# EAGLE board Schematic_pcb_OpenBook (EAGLE 9.7.0)
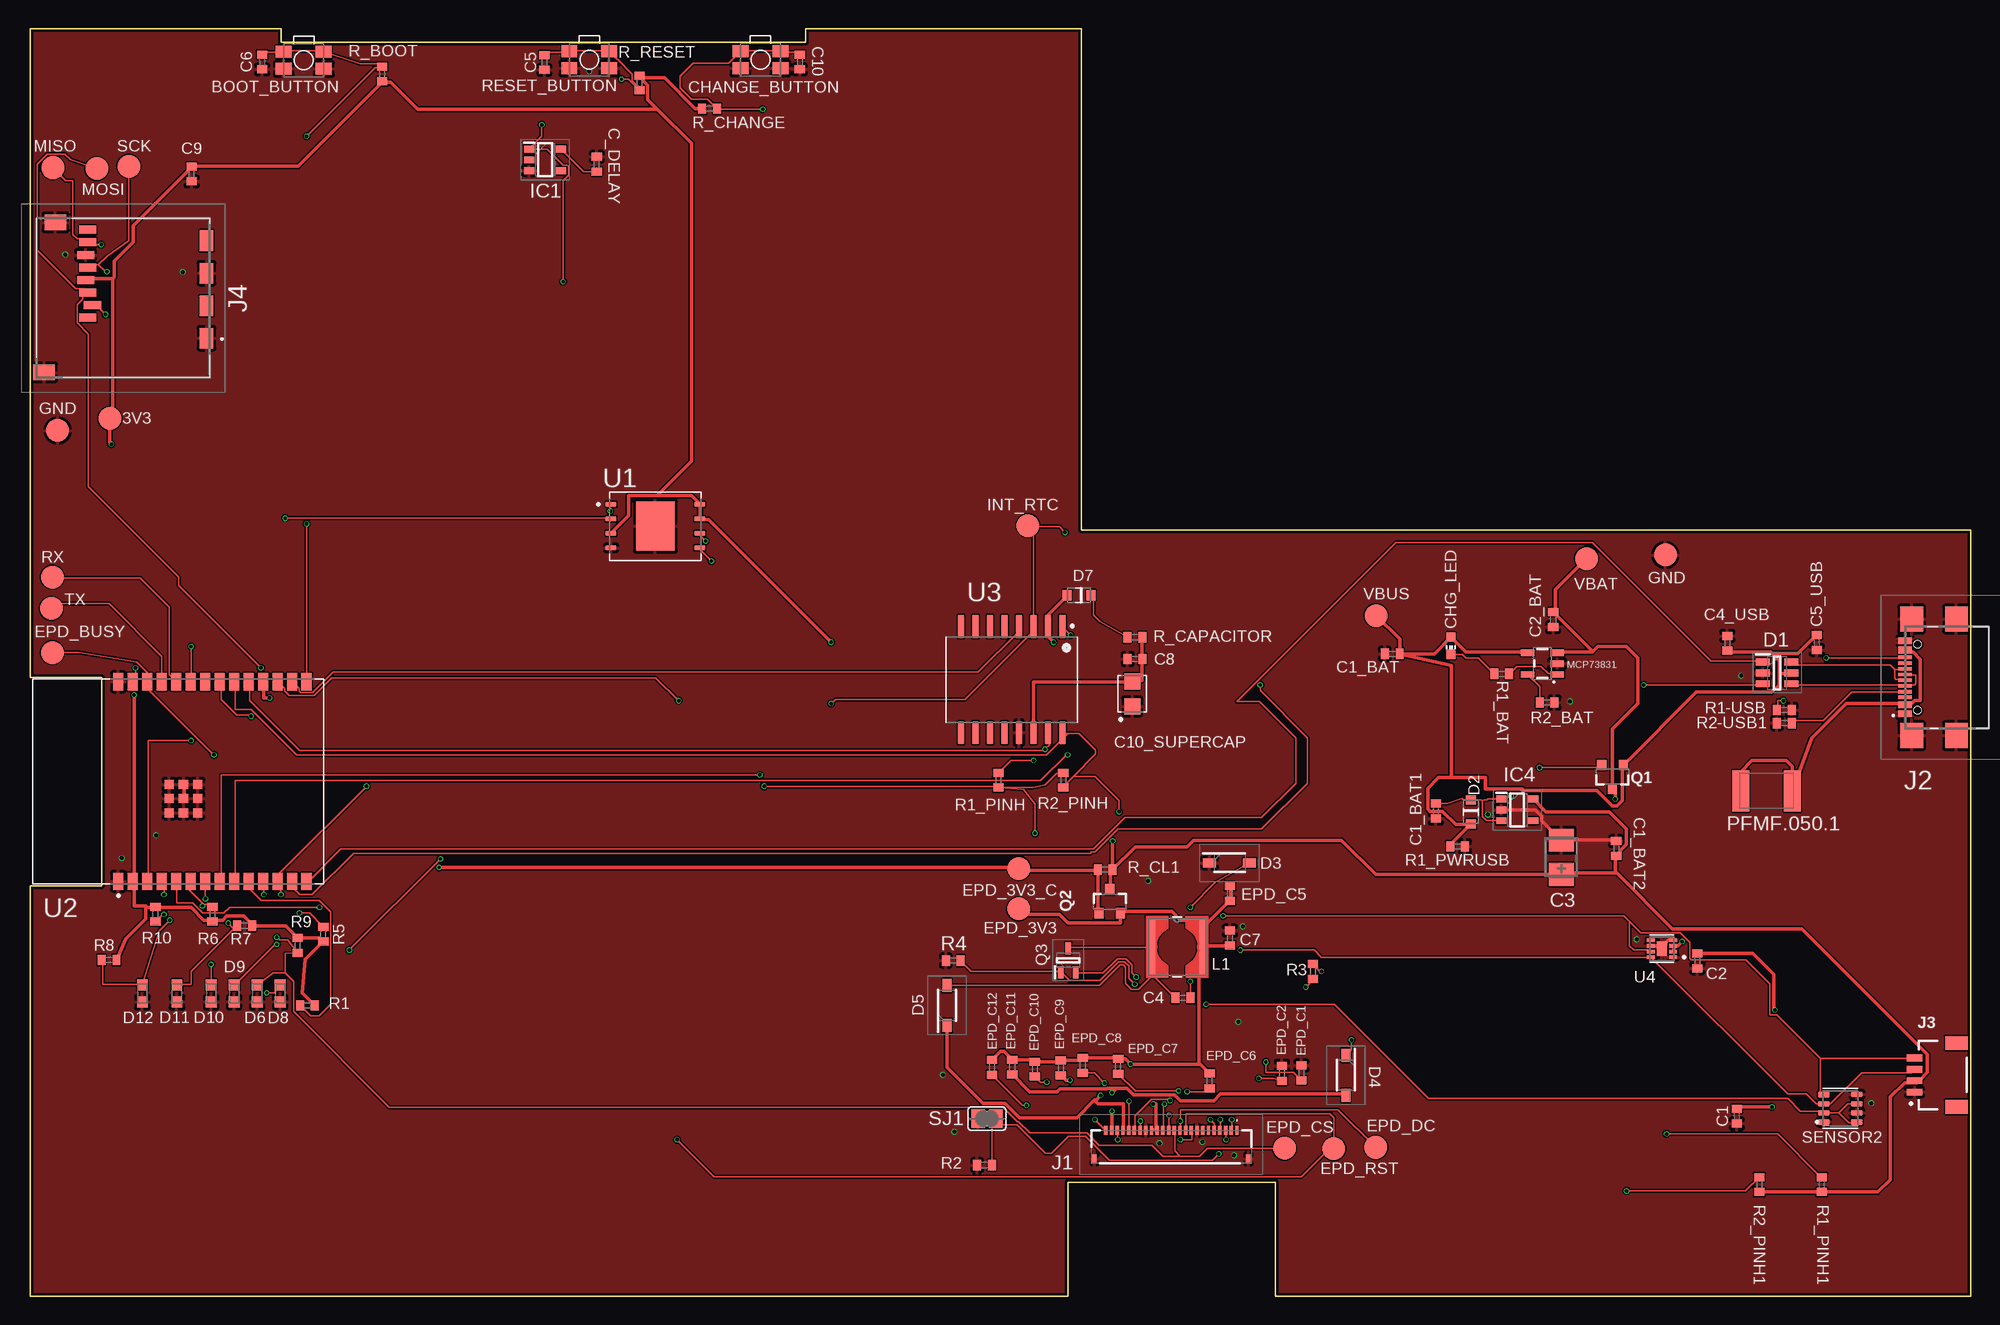
[diagram p0: board, top side]
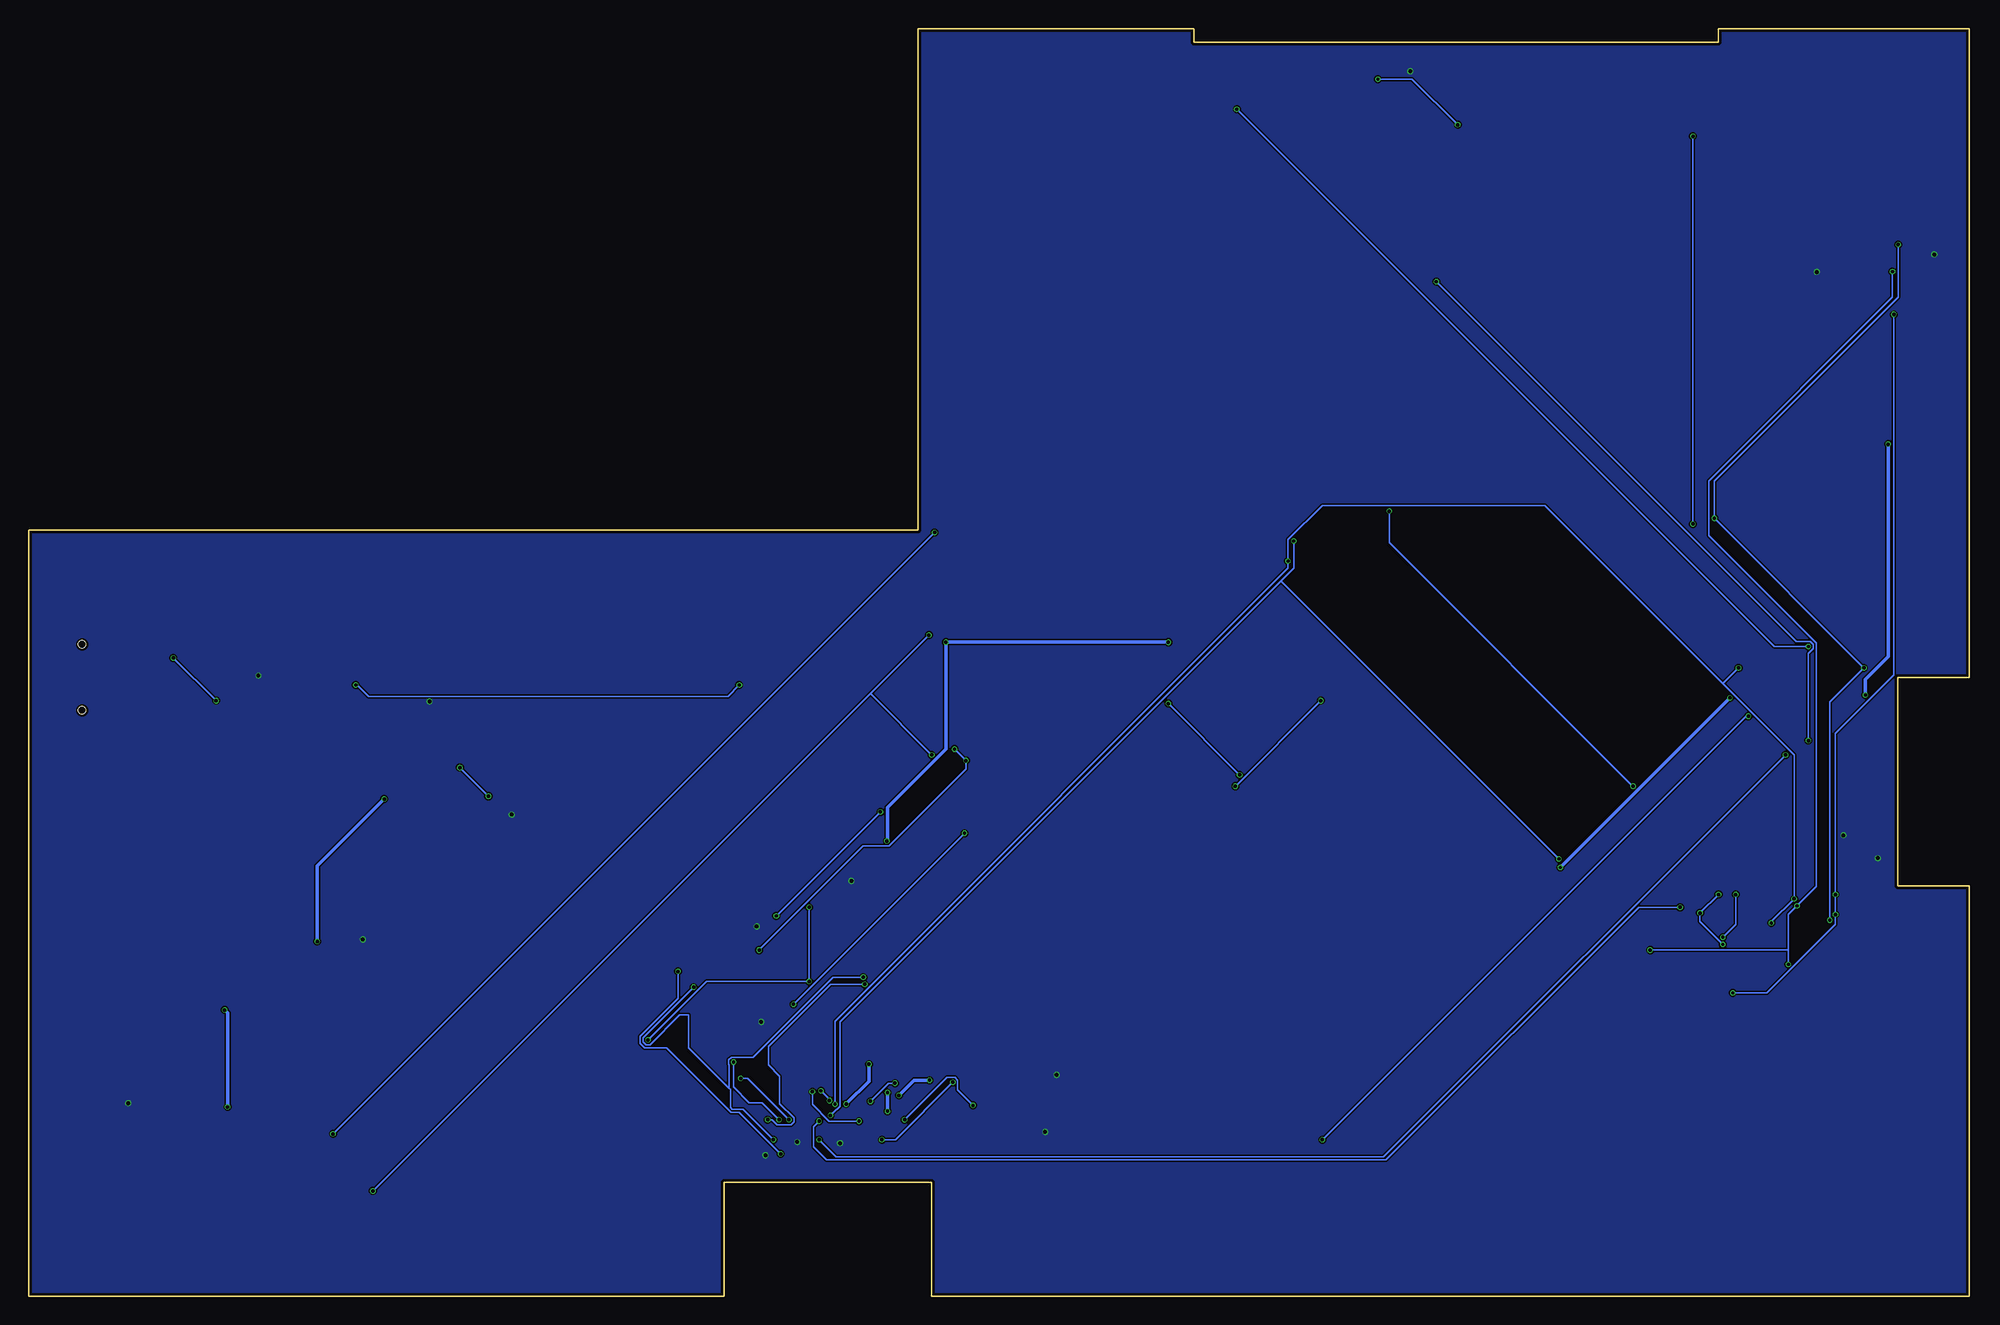
[diagram p1: board, bottom side, seen from below]

Size 170.2 x 111.2 mm. Coordinates in mm from the lower left corner, seen from the top.
Outline: 0,36 0,0 91,0 91,10 109.2,10 109.2,0 170.2,0 170.2,67.2 92.2,67.2 92.2,111.2 68,111.2 68,110 22.04,110 22.04,111.2 0,111.2 0,54.29 6.28,54.29 6.28,36 0,36
Copper layers (1*16): Top 0.035mm / dielectric 1.6mm / Bottom 0.035mm
Design rules "jlcpcb-2layers": minimum track width 0.15mm, minimum drill 0.3mm, track to track 5mil, track to pad 5mil, pad to pad 5mil, via to via 5mil, smd to smd 5mil, copper to edge 0.2mm, drill to drill 6mil, minimum pad ring 10mil, minimum via ring 3mil, stop-mask expansion 4mil, vias tented up to drill 0mil, thermal gap 10mil
Net classes: 1 PWR: width 0.3 mm

## Footprints (pad centres in the part's own frame; a part is rotated, then mirrored left to right if it is on the bottom)
MYBUTTON = smd 1.4 x 1.05: 1 1.75,0.75; 2 -1.75,0.75; 3 -1.75,-0.75; 4 1.75,-0.75
EAGLE-LTSPICE_C0402 = smd 0.7 x 0.9: 1 -0.65,0; 2 0.65,0
RCL_CT3528 = smd 2 x 2.2: + -1.5,0; - 1.5,0
CAPCP3225X100N = smd 1.4 x 1.4: 1 -1.1,0; 2 1.1,0
ADAFRUIT_CHIP-LED0603 = smd 0.8 x 0.8: A 0,-0.75; C 0,0.75
SOT95P280X145-6N = smd 1.2 x 0.6: 1 -1.25,0.95; 2 -1.25,0; 3 -1.25,-0.95; 4 1.25,-0.95; 5 1.25,0; 6 1.25,0.95
ESP32_WROVER_AVX---SD0805S020S1R0_AVX_SD0805S020S1R0_0 = smd 0.8 x 0.9: 1 -1.05,0; 2 1.05,0
SOD3716X135N = smd 1.15 x 0.8: 1 -1.75,0; 2 1.75,0
DIOC1608X36N = smd 0.97 x 0.94: 1 -0.75,0; 2 0.75,0
SOT95P280X125-5N = smd 0.9 x 0.6: 1 -1.4,0.95; 2 -1.4,0; 3 -1.4,-0.95; 4 1.4,-0.95; 5 1.4,0.95
SOT95P280X120-5N = smd 0.9 x 0.6: 1 -1.4,0.95; 2 -1.4,0; 3 -1.4,-0.95; 4 1.4,-0.95; 5 1.4,0.95
FH34SRJ24S05SH99 = smd 0.3 x 0.8: 1 5.75,1.45; 2 5.25,1.45; 3 4.75,1.45; 4 4.25,1.45; 5 3.75,1.45; 6 3.25,1.45; 7 2.75,1.45; 8 2.25,1.45; 9 1.75,1.45; 10 1.25,1.45; 11 0.75,1.45; 12 0.25,1.45; 13 -0.25,1.45; 14 -0.75,1.45; 15 -1.25,1.45; 16 -1.75,1.45; 17 -2.25,1.45; 18 -2.75,1.45; 19 -3.25,1.45; 20 -3.75,1.45; 21 -4.25,1.45; 22 -4.75,1.45; 23 -5.25,1.45; 24 -5.75,1.45 | smd 0.4 x 0.8: MP1 6.75,-1.05; MP2 -6.75,-1.05
SAMACSYS_PARTS_USB4110GFA = smd 0.3 x 1.15: A1 -3.35,3.678; A4 -2.55,3.678; A5 -1.25,3.678; A6 -0.25,3.678; A7 0.25,3.678; A8 1.25,3.678; A9 2.55,3.678; A12 3.35,3.678; B1 3.05,3.678; B4 2.25,3.678; B5 1.75,3.678; B6 0.75,3.678; B7 -0.75,3.678; B8 -1.75,3.678; B9 -2.25,3.678; B12 -3.05,3.678 | smd 2.18 x 2: MP1 -5.11,-0.827; MP2 5.11,-0.827; MP3 -5.11,3.103; MP4 5.11,3.103 | hole 0.65: -2.89,2.603; 2.89,2.603
JST04_1MM_RA = smd 0.6 x 1.35: 1 -1.5,0; 2 -0.5,0; 3 0.5,0; 4 1.5,0 | smd 1.2 x 2: NC1 2.8,-3.675; NC2 -2.8,-3.675
112ATAARR03ATTEND = smd 1.8 x 1.2: G1 10.6,10.4; G2 4.9,10.4; S1 7.75,10.4; S2 2.05,10.4 | smd 1.4 x 1.9: G3 13.6,-3.85; G4 0.45,-2.85 | smd 0.7 x 1.5: P1 8.8,0; P2 7.7,0.4; P3 6.6,0; P4 5.5,-0.2; P5 4.4,0; P6 3.3,-0.2; P7 2.2,0; P8 1.1,0
IND_4828-WE-TPC_WRE = smd 0.635 x 4.826: 1 -2.286,0; 2 2.286,0
ESP32_WROVER_SPARKFUN-IC-POWER_SOT23-5 = smd 0.55 x 1.2: 1 -0.95,-1.3; 2 0,-1.3; 3 0.95,-1.3; 4 0.95,1.3; 5 -0.95,1.3
ESP32C6_VARISTOR_CT/CN1812 = smd 1.5 x 3.6: 1 -2.25,0; 2 2.25,0
ESP32_WROVER_SPARKFUN-DISCRETESEMI_SOT23-3 = smd 0.8 x 0.9: 1 -0.95,-1; 2 0.95,-1; 3 0,1.1
SOT65P210X110-3N = smd 1.05 x 0.5: 1 -1.05,0.65; 2 -1.05,-0.65; 3 1.05,0
ESP32_WROVER_EAGLE-LTSPICE_R0402 = smd 0.7 x 0.9: 1 -0.65,0; 2 0.65,0
ESP32_WROVER_BME680_PSON80P300X300X100-8N = smd 1.016 x 0.5: 1 1.458,1.2; 2 1.458,0.4; 3 1.458,-0.4; 4 1.458,-1.2; 5 -1.458,-1.22; 6 -1.458,-0.4; 7 -1.458,0.4; 8 -1.458,1.2
SJ = smd 1.168 x 1.6: 1 -0.762,0; 2 0.762,0
TP20R = smd 2 x 2: TP 0,0
SON127P600X800X80-9N = smd 0.94 x 0.44: 1 -3.895,1.905; 2 -3.895,0.635; 3 -3.895,-0.635; 4 -3.895,-1.905; 5 3.895,-1.905; 6 3.895,-0.635; 7 3.895,0.635; 8 3.895,1.905 | smd 3.4 x 4.3: 9 0,0
XCVR_ESP32-C6-WROOM-1-N8 = smd 1.5 x 0.9: 1 -8.75,5.26; 2 -8.75,3.99; 3 -8.75,2.72; 4 -8.75,1.45; 5 -8.75,0.18; 6 -8.75,-1.09; 7 -8.75,-2.36; 8 -8.75,-3.63; 9 -8.75,-4.9; 10 -8.75,-6.17; 11 -8.75,-7.44; 12 -8.75,-8.71; 13 -8.75,-9.98; 14 -8.75,-11.25; 15 8.75,-11.25; 16 8.75,-9.98; 17 8.75,-8.71; 18 8.75,-7.44; 19 8.75,-6.17; 20 8.75,-4.9; 21 8.75,-3.63; 22 8.75,-2.36; 23 8.75,-1.09; 24 8.75,0.18; 25 8.75,1.45; 26 8.75,2.72; 27 8.75,3.99; 28 8.75,5.26 | smd 0.8 x 0.8: 29_1 -2.755,0.79; 29_2 -1.505,0.79; 29_3 -0.255,0.79; 29_4 -2.755,-0.46; 29_5 -1.505,-0.46; 29_6 -0.255,-0.46; 29_7 -2.755,-1.71; 29_8 -1.505,-1.71; 29_9 -0.255,-1.71
SOIC127P1032X265-16N = smd 2.05 x 0.59: 1 -4.655,4.445; 2 -4.655,3.175; 3 -4.655,1.905; 4 -4.655,0.635; 5 -4.655,-0.635; 6 -4.655,-1.905; 7 -4.655,-3.175; 8 -4.655,-4.445; 9 4.655,-4.445; 10 4.655,-3.175; 11 4.655,-1.905; 12 4.655,-0.635; 13 4.655,0.635; 14 4.655,1.905; 15 4.655,3.175; 16 4.655,4.445
SON50P200X200X80-9N = smd 0.76 x 0.31: 1 -0.985,0.75; 2 -0.985,0.25; 3 -0.985,-0.25; 4 -0.985,-0.75; 8 0.985,0.75 | smd 0.762 x 0.31: 5 0.985,-0.75; 6 0.985,-0.25; 7 0.985,0.25 | smd 0.9 x 1.3: 9 0,0

## Placement (x,y rotation side)
BOOT_BUTTON  BUTTON_CUSYOMV1  [MYBUTTON]  24,108.41 180 top
C1  100nF  [EAGLE-LTSPICE_C0402]  149.66,15.82 270 top
C1_BAT  4.7uF  [EAGLE-LTSPICE_C0402]  119.45,56.36 180 top
C1_BAT1  4.7uF  [EAGLE-LTSPICE_C0402]  123.28,42.57 270 top
C1_BAT2  4.7uF  [EAGLE-LTSPICE_C0402]  139.09,39.28 90 top
C2  100nF  [EAGLE-LTSPICE_C0402]  146.2,29.43 270 top
C2_BAT  4.7uF  [EAGLE-LTSPICE_C0402]  133.56,59.36 270 top
C3  100uF  [RCL_CT3528]  134.26,38.52 90 top
C4  4.7uF/25V  [EAGLE-LTSPICE_C0402]  101.09,26.2 180 top
C4_USB  100nF  [EAGLE-LTSPICE_C0402]  148.83,57.28 90 top
C5  1uF  [EAGLE-LTSPICE_C0402]  45.11,108.22 270 top
C5_USB  4.7uF  [EAGLE-LTSPICE_C0402]  156.68,57.36 270 top
C6  100nF  [EAGLE-LTSPICE_C0402]  20.36,108.26 270 top
C7  10uF  [EAGLE-LTSPICE_C0402]  105.21,31.44 90 top
C8  100nF  [EAGLE-LTSPICE_C0402]  96.88,55.9 0 top
C9  100nF  [EAGLE-LTSPICE_C0402]  14.18,98.44 270 top
C10  100nF  [EAGLE-LTSPICE_C0402]  67.5,108.26 270 top
C10_SUPERCAP  CPH3225A  [CAPCP3225X100N]  96.66,52.85 90 top
C_DELAY  100nF  [EAGLE-LTSPICE_C0402]  49.7,99.31 90 top
CHANGE_BUTTON  BUTTON_CUSYOMV1  [MYBUTTON]  64.05,108.45 180 top
CHG_LED  [ADAFRUIT_CHIP-LED0603]  124.6,57.07 180 top
D1  USBLC6-2SC6Y  [SOT95P280X145-6N]  153.2,54.68 0 top
D2  ESP32_WROVER_AVX---SD0805S020S1R0_AVX_SD0805S020S1R0_0_0AVX_SD0805S020S1R0_0_0  [ESP32_WROVER_AVX---SD0805S020S1R0_AVX_SD0805S020S1R0_0]  126.34,42.49 270 top
D3  MBR0530  [SOD3716X135N]  105.18,38.03 0 top
D4  MBR0530  [SOD3716X135N]  115.39,19.4 270 top
D5  MBR0530  [SOD3716X135N]  80.41,25.52 90 top
D6  PGB1010603MR  [DIOC1608X36N]  19.93,26.57 90 top
D7  ESP32_WROVER_AVX---SD0805S020S1R0_AVX_SD0805S020S1R0_0_0AVX_SD0805S020S1R0_0_0  [ESP32_WROVER_AVX---SD0805S020S1R0_AVX_SD0805S020S1R0_0]  91.99,61.49 180 top
D8  PGB1010603MR  [DIOC1608X36N]  21.94,26.57 90 top
D9  PGB1010603MR  [DIOC1608X36N]  17.91,26.57 90 top
D10  PGB1010603MR  [DIOC1608X36N]  15.89,26.57 90 top
D11  PGB1010603MR  [DIOC1608X36N]  12.88,26.57 90 top
D12  PGB1010603MR  [DIOC1608X36N]  9.86,26.57 90 top
EPD_C1  1uF/50V  [EAGLE-LTSPICE_C0402]  111.48,19.61 270 top
EPD_C2  1uF/50V  [EAGLE-LTSPICE_C0402]  109.77,19.58 270 top
EPD_C5  0.1uF/50V  [EAGLE-LTSPICE_C0402]  105.21,35.34 270 top
EPD_C6  1uF/50V  [EAGLE-LTSPICE_C0402]  103.44,18.91 270 top
EPD_C7  1uF/50V  [EAGLE-LTSPICE_C0402]  95.42,20.18 270 top
EPD_C8  1uF/50V  [EAGLE-LTSPICE_C0402]  92.31,20.26 270 top
EPD_C9  1uF/50V  [EAGLE-LTSPICE_C0402]  90.39,20.05 90 top
EPD_C10  1uF/50V  [EAGLE-LTSPICE_C0402]  88.11,19.95 270 top
EPD_C11  1uF/50V  [EAGLE-LTSPICE_C0402]  86.13,20.12 270 top
EPD_C12  1uF/50V  [EAGLE-LTSPICE_C0402]  84.35,20.1 270 top
IC1  BD5229G-TR  [SOT95P280X125-5N]  45.17,99.68 0 top
IC4  XC6220A331MR-G  [SOT95P280X120-5N]  130.41,42.68 0 top
J1  FH34SRJ-24S-0.5SH_99_  [FH34SRJ24S05SH99]  100.08,13.11 0 top
J2  SAMACSYS_PARTS_USB4110-GF-A  [SAMACSYS_PARTS_USB4110GFA]  168.1,54.3 90 top
J3  QWIIC_RIGHT_ANGLE  [JST04_1MM_RA]  165.25,19.43 90 top
J4  112A-TAAR-R03_ATTEND  [112ATAARR03ATTEND]  5.08,94.64 270 top
L1  744043680IND_4828-WE-TPC_WRE  [IND_4828-WE-TPC_WRE]  100.59,30.66 0 top
MCP73831  ESP32_WROVER_SPARKFUN-IC-POWER_MCP73831  [ESP32_WROVER_SPARKFUN-IC-POWER_SOT23-5]  132.61,55.5 90 top
PFMF.050.1  ESP32C6_VARISTORCN1812  [ESP32C6_VARISTOR_CT/CN1812]  152.28,44.34 0 top
Q1  20V/4.2A/52mΩ/1.4W  [ESP32_WROVER_SPARKFUN-DISCRETESEMI_SOT23-3]  138.76,45.61 180 top
Q2  20V/4.2A/52mΩ/1.4W  [ESP32_WROVER_SPARKFUN-DISCRETESEMI_SOT23-3]  94.68,34.61 0 top
Q3  SI1308EDL-T1-GE3  [SOT65P210X110-3N]  91.04,29.49 90 top
R1  10K  [ESP32_WROVER_EAGLE-LTSPICE_R0402]  24.33,25.52 0 top
R1-USB  5k1  [ESP32_WROVER_EAGLE-LTSPICE_R0402]  153.84,51.44 0 top
R1_BAT  200  [ESP32_WROVER_EAGLE-LTSPICE_R0402]  129.05,54.6 0 top
R1_PINH  10K  [ESP32_WROVER_EAGLE-LTSPICE_R0402]  84.93,45.28 90 top
R1_PINH1  10K  [ESP32_WROVER_EAGLE-LTSPICE_R0402]  157.12,9.82 90 top
R1_PWRUSB  100k  [ESP32_WROVER_EAGLE-LTSPICE_R0402]  125.18,39.47 180 top
R2  2.2  [ESP32_WROVER_EAGLE-LTSPICE_R0402]  83.69,11.52 0 top
R2-USB1  5k1  [ESP32_WROVER_EAGLE-LTSPICE_R0402]  153.84,50.28 0 top
R2_BAT  2K  [ESP32_WROVER_EAGLE-LTSPICE_R0402]  133.03,52.09 180 top
R2_PINH  10K  [ESP32_WROVER_EAGLE-LTSPICE_R0402]  90.61,45.28 270 top
R2_PINH1  10K  [ESP32_WROVER_EAGLE-LTSPICE_R0402]  151.63,9.82 90 top
R3  0.47  [ESP32_WROVER_EAGLE-LTSPICE_R0402]  112.49,28.52 270 top
R4  10K  [ESP32_WROVER_EAGLE-LTSPICE_R0402]  80.96,29.46 0 top
R5  10K  [ESP32_WROVER_EAGLE-LTSPICE_R0402]  25.72,31.78 90 top
R6  10K  [ESP32_WROVER_EAGLE-LTSPICE_R0402]  16,33.53 90 top
R7  10K  [ESP32_WROVER_EAGLE-LTSPICE_R0402]  18.83,32.52 180 top
R8  10K  [ESP32_WROVER_EAGLE-LTSPICE_R0402]  6.93,29.52 180 top
R9  10K  [ESP32_WROVER_EAGLE-LTSPICE_R0402]  23.47,30.78 270 top
R10  10K  [ESP32_WROVER_EAGLE-LTSPICE_R0402]  11,33.53 270 top
R_BOOT  10K  [ESP32_WROVER_EAGLE-LTSPICE_R0402]  30.88,107.22 90 top
R_CAPACITOR  15  [ESP32_WROVER_EAGLE-LTSPICE_R0402]  96.88,57.81 0 top
R_CHANGE  10K  [ESP32_WROVER_EAGLE-LTSPICE_R0402]  59.6,104.17 0 top
R_CL1  10K  [ESP32_WROVER_EAGLE-LTSPICE_R0402]  94.28,37.44 0 top
R_RESET  10K  [ESP32_WROVER_EAGLE-LTSPICE_R0402]  53.45,106.42 270 top
RESET_BUTTON  BUTTON_CUSYOMV1  [MYBUTTON]  49.04,108.45 180 top
SENSOR2  ESP32_WROVER_BME680_BME680  [ESP32_WROVER_BME680_PSON80P300X300X100-8N]  158.74,16.5 180 top
SJ1  [SJ]  83.91,15.6 0 top
TP1  TPTP20R  [TP20R]  1.87,60.34 0 top
TP2  TPTP20R  [TP20R]  1.96,63.08 0 top
TP3  TPTP20R  [TP20R]  136.49,64.7 0 top
TP4  TPTP20R  [TP20R]  2.41,75.95 0 top
TP5  TPTP20R  [TP20R]  143.41,65.03 0 top
TP6  TPTP20R  [TP20R]  2,98.99 0 top
TP7  TPTP20R  [TP20R]  5.86,98.93 0 top
TP8  TPTP20R  [TP20R]  8.67,99.11 0 top
TP9  TPTP20R  [TP20R]  1.96,56.47 0 top
TP10  TPTP20R  [TP20R]  110,13 0 top
TP11  TPTP20R  [TP20R]  118,13.08 0 top
TP12  TPTP20R  [TP20R]  114.32,12.95 0 top
TP13  TPTP20R  [TP20R]  86.72,37.52 0 top
TP14  TPTP20R  [TP20R]  118.04,59.7 0 top
TP15  TPTP20R  [TP20R]  87.49,67.6 0 top
TP16  TPTP20R  [TP20R]  7,77 0 top
TP17  TPTP20R  [TP20R]  86.69,34 0 top
U1  W25Q512JVEIQ  [SON127P600X800X80-9N]  54.83,67.56 0 top
U2  ESP32-C6-WROOM-1-N8  [XCVR_ESP32-C6-WROOM-1-N8]  13,45.17 90 top
U3  DS3231SN#  [SOIC127P1032X265-16N]  86.09,54.1 270 top
U4  MAX17048G+T10  [SON50P200X200X80-9N]  143.1,30.5 180 top

## Library data of the parts
BOOT_BUTTON CHANGE_BUTTON CHG_LED PFMF.050.1 RESET_BUTTON SJ1 TP1-TP17 = DeskAssistant v19 v1
C1 C1_BAT C1_BAT1 C1_BAT2 C2 C2_BAT C4 C4_USB C5 C5_USB C6-C10 C_DELAY EPD_C1 EPD_C2 EPD_C5-EPD_C12 = DeskAssistant v19 v1; SPICEMODEL: NONE; SPICEPREFIX: C
C3 = DeskAssistant v19 v1; SPICEPREFIX: C
C10_SUPERCAP = DeskAssistant v19 v1; AVAILABILITY: Not in stock; CHECK_PRICES: https://www.snapeda.com/parts/CPH3225A/Seiko+Instruments/view-part/?ref=eda; DESCRIPTION: 11 mF (EDLC) Supercapacitor 3.3 V 1210 (3225 Metric) - -; MF: Seiko Instruments; MP: CPH3225A; PACKAGE: 1210 Seiko; PRICE: None; PURCHASE-URL: https://www.snapeda.com/api/url_track_click_mouser/?unipart_id=562593&manufacturer=Seiko Instruments&part_name=CPH3225A&search_term=None; SNAPEDA_LINK: https://www.snapeda.com/parts/CPH3225A/Seiko+Instruments/view-part/?ref=snap
D1 = DeskAssistant v19 v1; AVAILABILITY: In Stock; CHECK_PRICES: https://www.snapeda.com/parts/USBLC6-2SC6Y/STMicroelectronics/view-part/?ref=eda; DESCRIPTION: 17V Clamp 5A (8/20µs) Ipp Tvs Diode Surface Mount SOT-23-6; MF: STMicroelectronics; MP: USBLC6-2SC6Y; PACKAGE: SOT-23-6 STMicroelectronics; PRICE: None; SNAPEDA_LINK: https://www.snapeda.com/parts/USBLC6-2SC6Y/STMicroelectronics/view-part/?ref=snap
D2 D7 = DeskAssistant v19 v1; CENTROID_NOT_SPECIFIED: No; DATASHEET: http://datasheets.avx.com/schottky.pdf; DIGIKEY_DESCRIPTION: DIODE SCHOTTKY 20V 1A 0805; DIGIKEY_PART_NUMBER: 478-7800-1-ND; LEAD_FREE: yes; MF: AVX; MOUSER_PART_NUMBER: 581-SD0805S020S1R0; PACKAGE: 0805 (2012 metric); PREFIX: D; ROHS: yes; TEMPERATURE_RANGE_HIGH: +125°C; TEMPERATURE_RANGE_LOW: -55°C
D3-D5 = DeskAssistant v19 v1; AVAILABILITY: In Stock; CHECK_PRICES: https://www.snapeda.com/parts/MBR0530/Onsemi/view-part/?ref=eda; DESCRIPTION: Diode Schottky 30 V 500mA Surface Mount SOD-123; MF: ON Semiconductor; MP: MBR0530; PACKAGE: SOD-123-2 ON Semiconductor; PRICE: None; PURCHASE-URL: https://www.snapeda.com/api/url_track_click_mouser/?unipart_id=179458&manufacturer=ON Semiconductor&part_name=MBR0530&search_term=None; SNAPEDA_LINK: https://www.snapeda.com/parts/MBR0530/Onsemi/view-part/?ref=snap
D6 D8-D12 = DeskAssistant v19 v1; AVAILABILITY: In Stock; CHECK_PRICES: https://www.snapeda.com/parts/PGB1010603MR/Littelfuse/view-part/?ref=eda; DESCRIPTION: 150V (Typ) Clamp - Ipp Tvs Diode Surface Mount 0603 (1608 Metric); MF: Littelfuse Inc.; MP: PGB1010603MR; PACKAGE: 0603 Littelfuse Inc.; PRICE: None; PURCHASE-URL: https://www.snapeda.com/api/url_track_click_mouser/?unipart_id=5659453&manufacturer=Littelfuse Inc.&part_name=PGB1010603MR&search_term=None; SNAPEDA_LINK: https://www.snapeda.com/parts/PGB1010603MR/Littelfuse/view-part/?ref=snap
IC1 = DeskAssistant v19 v1; DESCRIPTION: Voltage Detector with Adjustable Delay Time: CMOS processes are utilized to develop high precision, low current consumption CMOS reset ICs that allow arbitrary setting of the delay time. The extensive lineup includes both Nch Open Drain and CMOS output types in a wide range of detection voltages (from 2.3V to 6.0V, in 0.1V steps), enabling selection of the ideal solution based on customer requirements. In addition, the entire series is of course both lead-free and RoHS-compliant.; HEIGHT: 1.25mm; MANUFACTURER_NAME: ROHM Semiconductor; MANUFACTURER_PART_NUMBER: BD5229G-TR; MOUSER_PART_NUMBER: 755-BD5229G-TR; MOUSER_PRICE-STOCK: https://www.mouser.co.uk/ProductDetail/ROHM-Semiconductor/BD5229G-TR?qs=4kLU8WoGk0vvnhrrYwdszw%3D%3D
IC4 = DeskAssistant v19 v1; DESCRIPTION: LDO Voltage Regulators; HEIGHT: 1.2mm; MANUFACTURER_NAME: Torex; MANUFACTURER_PART_NUMBER: XC6220A331MR-G; MOUSER_PART_NUMBER: 865-XC6220A331MR-G; MOUSER_PRICE-STOCK: https://www.mouser.co.uk/ProductDetail/Torex-Semiconductor/XC6220A331MR-G?qs=AsjdqWjXhJ8ZSWznL1J0gg%3D%3D
J1 = DeskAssistant v19 v1; DESCRIPTION: 24 Position FFC, FPC Connector Contacts, Top and Bottom 0.020" (0.50mm) Surface Mount, Right Angle; HEIGHT: 1.1mm; MANUFACTURER_NAME: Hirose; MANUFACTURER_PART_NUMBER: FH34SRJ-24S-0.5SH(99); MOUSER_PART_NUMBER: 798-FH34SRJ24S05SH99; MOUSER_PRICE-STOCK: https://www.mouser.co.uk/ProductDetail/Hirose-Connector/FH34SRJ-24S-0.5SH99?qs=vcbW%252B4%252BSTIpKBl5ap9J8Fw%3D%3D
J2 = DeskAssistant v19 v1; DESCRIPTION: CONN USB 2.0 TYPE-C R/A SMT; HEIGHT: 3.26mm; MANUFACTURER_NAME: GCT (GLOBAL CONNECTOR TECHNOLOGY); MANUFACTURER_PART_NUMBER: USB4110-GF-A; MOUSER_PART_NUMBER: 640-USB4110-GF-A; MOUSER_PRICE-STOCK: https://www.mouser.co.uk/ProductDetail/GCT/USB4110-GF-A?qs=KUoIvG%2F9IlYiZvIXQjyJeA%3D%3D
J3 = DeskAssistant v19 v1; PROD_ID: CONN-13694
J4 = DeskAssistant v19 v1; DESCRIPTION: Micro SD Card Socket, Push-Push Type, Top Mount, SMT, H=1.83mm, 10u; HEIGHT: 1.9mm; MANUFACTURER_NAME: ATTEND; MANUFACTURER_PART_NUMBER: 112A-TAAR-R03 ATTEND
L1 = DeskAssistant v19 v1; COPYRIGHT: Copyright (C) 2024 Ultra Librarian. All rights reserved.; MANUFACTURER_PART_NUMBER: 68uH; MFR_NAME: Wurth Electronics
MCP73831 = DeskAssistant v19 v1; PROD_ID: IC-09995
Q1 = DeskAssistant v19 v1; PROD_ID: TRAN-14388
Q2 = DeskAssistant v19 v1; PRODUCT: DMG2305UX-7; PROD_ID: TRAN-14388
Q3 = DeskAssistant v19 v1; AVAILABILITY: In Stock; CHECK_PRICES: https://www.snapeda.com/parts/SI1308EDL-T1-GE3/Vishay+Siliconix/view-part/?ref=eda; DESCRIPTION: Si1308EDL-T1-GE3 N-channel MOSFET Transistor, 1.5 A, 30 V, 3-Pin SC-70 | Siliconix / Vishay SI1308EDL-T1-GE3; MF: Vishay Siliconix; MP: SI1308EDL-T1-GE3; PACKAGE: SOT-323 Vishay Semiconductor; PRICE: None; PURCHASE-URL: https://www.snapeda.com/api/url_track_click_mouser/?unipart_id=274603&manufacturer=Vishay Siliconix&part_name=SI1308EDL-T1-GE3&search_term=None; SNAPEDA_LINK: https://www.snapeda.com/parts/SI1308EDL-T1-GE3/Vishay+Siliconix/view-part/?ref=snap
R1 R1-USB R1_BAT R1_PINH R1_PINH1 R1_PWRUSB R2 R2-USB1 R2_BAT R2_PINH R2_PINH1 R3-R10 R_BOOT R_CAPACITOR R_CHANGE R_CL1 R_RESET = DeskAssistant v19 v1; SPICEMODEL: NONE; SPICEPREFIX: R
SENSOR2 = DeskAssistant v19 v1; AVAILABILITY: Unavailable; DESCRIPTION: Integrated Environmental Unit; MF: Bosch Sensortec; MP: BME680; PACKAGE: LGA-8 Bosch Tools; PRICE: None
U1 = DeskAssistant v19 v1; AVAILABILITY: In Stock; CHECK_PRICES: https://www.snapeda.com/parts/W25Q512JVEIQ/Winbond+Electronics/view-part/?ref=eda; DESCRIPTION: FLASH - NOR Memory IC 512Mb (64M x 8) SPI - Quad I/O 133 MHz 8-WSON (8x6); MF: Winbond Electronics; MP: W25Q512JVEIQ; PACKAGE: Package; PRICE: None; SNAPEDA_LINK: https://www.snapeda.com/parts/W25Q512JVEIQ/Winbond+Electronics/view-part/?ref=snap
U2 = DeskAssistant v19 v1; AVAILABILITY: In Stock; CHECK_PRICES: https://www.snapeda.com/parts/ESP32-C6-WROOM-1-N8/Espressif+Systems/view-part/?ref=eda; DESCRIPTION: Multiprotocol Modules ESP32-C6 module, Wi-Fi 6 in 2.4 GHz band, Bluetooth 5, Zigbee 3.0 and Thread. ESP34-WROOM Compatible - ENGINEERING SAMPLE; MF: Espressif Systems; MP: ESP32-C6-WROOM-1-N8; PACKAGE: None; PRICE: None; SNAPEDA_LINK: https://www.snapeda.com/parts/ESP32-C6-WROOM-1-N8/Espressif+Systems/view-part/?ref=snap
U3 = DeskAssistant v19 v1; AVAILABILITY: In Stock; CHECK_PRICES: https://www.snapeda.com/parts/DS3231SN%23/Analog+Devices/view-part/?ref=eda; DESCRIPTION: Extremely Accurate I²C-Integrated RTC/TCXO/Crystal; MF: Analog Devices; MP: DS3231SN#; PACKAGE: SOIC-16 Maxim; PRICE: None; PURCHASE-URL: https://www.snapeda.com/api/url_track_click_mouser/?unipart_id=99048&manufacturer=Analog Devices&part_name=DS3231SN#&search_term=None; SNAPEDA_LINK: https://www.snapeda.com/parts/DS3231SN%23/Analog+Devices/view-part/?ref=snap
U4 = DeskAssistant v19 v1; AVAILABILITY: In Stock; CHECK_PRICES: https://www.snapeda.com/parts/MAX17048G+T10/Analog+Devices/view-part/?ref=eda; DESCRIPTION: 3µA 1-Cell/2-Cell Fuel Gauge with ModelGauge; MF: Analog Devices; MP: MAX17048G+T10; PACKAGE: TDFN-8 Maxim; PRICE: None; PURCHASE-URL: https://www.snapeda.com/api/url_track_click_mouser/?unipart_id=329239&manufacturer=Analog Devices&part_name=MAX17048G+T10&search_term=None; SNAPEDA_LINK: https://www.snapeda.com/parts/MAX17048G+T10/Analog+Devices/view-part/?ref=snap

## Nets
3V3 [PWR]: C1_BAT2.1 C3.+ C9.1 D7.2 IC4.5 J3.2 J4.P4 Q2.3 R1.2 R1_PINH1.1 R2_PINH1.1 R5.1 R6.1 R7.1 R8.1 R9.1 R10.1 R_BOOT.1 R_CHANGE.1 R_CL1.2 R_RESET.1 TP16.TP U1.3 U1.7 U1.8 U2.2 U3.2
32KHZ [NORMAL]: R2_PINH1.2 U2.9 U3.1
DN [NORMAL]: D1.4 J2.A7 J2.B7
DP [NORMAL]: D1.6 J2.A6 J2.B6
EPD_3V3 [PWR]: C7.1 EPD_C5.1 EPD_C5.2 EPD_C6.1 EPD_C7.1 EPD_C8.1 EPD_C9.2 EPD_C10.1 EPD_C11.1 EPD_C12.1 J1.15 J1.16 L1.2 Q2.2 TP17.TP
EPD_3V3_C [PWR]: Q2.1 R_CL1.1 TP13.TP U2.18
EPD_BUSY [NORMAL]: J1.9 TP9.TP U2.26
EPD_CS [NORMAL]: D6.2 J1.12 R9.2 TP10.TP U2.11
EPD_DC [NORMAL]: J1.11 TP11.TP U2.5
EPD_RST [NORMAL]: J1.10 TP12.TP U2.21
FLASH_CS [NORMAL]: D9.2 R5.2 U1.1 U2.12
GDR [NORMAL]: J1.2 Q3.1 R4.2
GND [PWR]: BOOT_BUTTON.1 BOOT_BUTTON.2 C1.2 C1_BAT1.2 C1_BAT2.2 C1_BAT.2 C2.2 C2_BAT.2 C3.- C4_USB.2 C5.2 C5_USB.2 C6.2 C7.2 C8.1 C9.2 C10.2 C10_SUPERCAP.1 C_DELAY.2 CHANGE_BUTTON.1 CHANGE_BUTTON.2 D1.2 D3.1 D6.1 D8.1 D9.1 D10.1 D11.1 D12.1 EPD_C1.1 EPD_C2.1 IC1.3 IC4.2 J1.8 J1.17 J1.MP1 J1.MP2 J2.A1 J2.A12 J2.B1 J2.B12 J2.MP1 J2.MP2 J2.MP3 J2.MP4 J3.1 J4.G1 J4.G2 J4.G3 J4.G4 J4.P6 MCP73831.2 R1-USB.2 R1_PWRUSB.1 R2-USB1.1 R2.1 R2_BAT.1 R4.1 RESET_BUTTON.1 RESET_BUTTON.2 SENSOR2.1 SENSOR2.5 SENSOR2.7 SJ1.1 TP4.TP TP5.TP U1.4 U1.9 U2.1 U2.28 U2.29_1 U2.29_2 U2.29_3 U2.29_4 U2.29_5 U2.29_6 U2.29_7 U2.29_8 U2.29_9 U3.13 U4.1 U4.4 U4.6 U4.9
GPIO8 [NORMAL]: R1.1 U2.10
I2C_PW [NORMAL]: R1_PINH.1 R2_PINH.1 SENSOR2.2 SENSOR2.6 SENSOR2.8 U2.17
INT_RTC [NORMAL]: R1_PINH1.2 TP15.TP U2.8 U3.3
IO/BOOT [NORMAL]: BOOT_BUTTON.3 BOOT_BUTTON.4 C6.1 R_BOOT.2 U2.15
IO/CHANGE [NORMAL]: C10.1 CHANGE_BUTTON.3 CHANGE_BUTTON.4 R_CHANGE.2 U2.23
MISO [NORMAL]: D12.2 J4.P7 R8.2 TP6.TP U1.2 U2.27
MOSI [NORMAL]: D11.2 J1.14 J4.P3 R7.2 TP7.TP U1.5 U2.7
N$1 [NORMAL]: J2.A5 R2-USB1.2
N$2 [NORMAL]: J2.B5 R1-USB.1
N$3 [NORMAL]: MCP73831.1 R1_BAT.2
N$4 [NORMAL]: C1_BAT1.1 D2.1 IC4.1 IC4.3 Q1.2
N$5 [NORMAL]: CHG_LED.C R1_BAT.1
N$6 [NORMAL]: C4.1 D3.2 D4.1
N$7 [NORMAL]: MCP73831.5 R2_BAT.2
N$8 [NORMAL]: EPD_C2.2 J1.5
N$9 [NORMAL]: EPD_C8.2 J1.20
N$10 [NORMAL]: EPD_C12.2 J1.24
N$11 [NORMAL]: EPD_C1.2 J1.4
N$12 [NORMAL]: EPD_C10.2 J1.22
N$13 [NORMAL]: C_DELAY.1 IC1.5
N$14 [NORMAL]: D7.1 R_CAPACITOR.1
N$19 [NORMAL]: EPD_C7.2 J1.19
N$20 [NORMAL]: EPD_C6.2 J1.18
PREVGH [PWR]: D5.1 EPD_C9.1 J1.21
PREVGL [PWR]: D4.2 EPD_C11.2 J1.23
RESE [NORMAL]: J1.3 Q3.2 R3.2
RESE' [NORMAL]: R2.2 R3.1 SJ1.2
RESET [NORMAL]: C5.1 IC1.1 R_RESET.2 RESET_BUTTON.3 RESET_BUTTON.4 U2.3
RTC_RST [NORMAL]: U2.16 U3.4
RX [NORMAL]: TP2.TP U2.24
SCK [NORMAL]: D10.2 J1.13 J4.P5 R6.2 TP8.TP U1.6 U2.6
SCL [NORMAL]: J3.4 R2_PINH.2 SENSOR2.4 U2.20 U3.16 U4.7
SDA [NORMAL]: J3.3 R1_PINH.2 SENSOR2.3 U2.19 U3.15 U4.8
SRC [NORMAL]: C4.2 D5.2 L1.1 Q3.3
SS_SD [NORMAL]: D8.2 J4.P2 R10.2 U2.4
TX [NORMAL]: TP1.TP U2.25
USB_D+ [NORMAL]: D1.1 U2.14
USB_D- [NORMAL]: D1.3 U2.13
VBAT [PWR]: C2_BAT.1 MCP73831.3 Q1.3 TP3.TP U4.2 U4.3
VBUS [PWR]: C1_BAT.1 C4_USB.1 C5_USB.1 CHG_LED.A D1.5 D2.2 MCP73831.4 Q1.1 R1_PWRUSB.2 TP14.TP
VBUS1 [PWR]: C1.1 C2.1
VRTC [PWR]: C8.2 C10_SUPERCAP.2 R_CAPACITOR.2 U3.14
VUSB [PWR]: J2.A4 J2.A9 J2.B4 J2.B9 PFMF.050.1.1 PFMF.050.1.2

## Tracks (layer width: path | path; a pad name or v marks a point on that pad's centre or on a via)
3V3  (via drill 0.3)
  Top 0.3: Q2.3 94.75,35.75 94.75,37.38 94.88,37.38 R_CL1.2 | D7.2 90.88,61.38 89.25,59.75 89.25,58.88 U3.2 89.25,58.62 89.25,57.88 v89.75,57.38 | 139,37.12 139,38.62 | 139,37.12 134.38,37.12 C3.+ 134.25,37 118,37 115,40 102,40 101.44,39.44 96.93,39.44 R_CL1.2 | 139,38.62 C1_BAT2.1 | 139,37.12 139.12,37.12 144,32.25 155.38,32.25 166.38,21.25 166.38,19.65 165.65,18.93 | 10.12,34.12 10.12,33.12 8.38,31.38 R8.1 | 10.12,34.12 11,34.12 R10.1 11.12,34.12 14.12,34.12 15.25,33 16,33 R6.1 16.12,33 16.88,33 17.25,33.38 18.75,33.38 19.5,32.62 R7.1 19.5,32.5 22.4,32.5 R9.1 25.42,31.43 R5.1 24.13,29.55 23.88,26.62 R1.2 | 10.12,34.12 10.12,34.25 9.12,34.25 9.12,36.38 U2.2 9.12,36.5 v9.12,52.75 | 55,70.25 58,70.25 58.75,69.5 U1.8 58.75,69.38 58.75,68.25 U1.7 58.75,68.12 59.5,68.12 v70.25,57.38 | 55,70.25 52.5,70.25 52.5,68.5 51,67 U1.3 | 7.25,89.25 4.88,89.25 J4.P4 | 7.25,89.25 7.25,77.25 TP16.TP 7,74.88 v7.12,74.75 | 55,104.12 34,104.12 31.62,106.5 31,106.5 R_BOOT.1 30.88,106.5 23.5,99.12 14.25,99.12 C9.1 14.18,99.06 9.04,93.92 9.04,92.45 7.38,90.78 7.38,89.38 7.25,89.25 | 139,38.62 140,39.62 140,41 138.5,42.5 132.94,42.5 IC4.5 | 55,70.25 58,73.25 58,101.12 55,104.12 | 55,104.12 54.17,104.95 54.17,106.24 53.45,106.97 R_RESET.1 53.64,106.88 55.63,106.88 58.34,104.17 R_CHANGE.1 | R2_PINH1.1 R1_PINH1.1 162.04,9.17 163.12,10.25 163.12,17.5 164.38,18.75 165.47,18.75 165.65,18.93 | R_CL1.2 v94.93,39.93 v94.94,39.94 | J3.2 165.65,18.93
  Bottom 0.3: v9.12,52.75 9.12,54.12 7.12,56.12 v7.12,74.75 | v70.25,57.38 v89.75,57.38 89.75,48 94.88,42.88 94.88,40 v94.94,39.94
32KHZ  (via drill 0.3)
  Top 0.15: v91.25,58 90.5,58.75 U3.1 | v91,47.5 90.88,47.5 88.62,45.25 18,45.25 18,36.5 U2.9 | v140,9.25 150.41,9.25 R2_PINH1.2
  Bottom 0.15: v91.25,58 96.38,52.88 | 96.38,52.88 v140,9.25 | 96.38,52.88 v91,47.5
DN
  Top 0.15: J2.A7 164.5,54.5 165.38,54.5 165.38,53.75 165.25,53.62 164.5,53.62 J2.B7 164.38,53.62 154.5,53.62 D1.4
DP
  Top 0.15: 163.5,55 163.5,54.25 163.62,54.12 164.38,54.12 J2.A6 | 163.5,55 164.38,55 J2.B6 | 163.5,55 163.12,55.38 154.75,55.38 154.5,55.62 D1.6
EPD_3V3  (via drill 0.3)
  Top 0.3: J1.16 98.38,14.62 98.75,14.62 J1.15 98.75,14.75 98.75,16.88 v98.5,16.88 | EPD_C5.1 105.25,35.88 105.25,34.75 EPD_C5.2 105.12,34.62 103.12,32.62 103.12,30.88 L1.2 | C7.1 105.12,30.75 103,30.75 L1.2 | TP17.TP 86.87,33.5 90.25,33.5 91,32.75 95.62,32.75 95.62,33.5 Q2.2 95.62,33.75 100.12,33.75 100.88,33 102.62,33 103,32.62 L1.2 | L1.2 102.75,30.62 102.5,30.62 102.5,20.5 102.62,20.38 | EPD_C12.1 85.1,21.5 85.4,21.5 EPD_C11.1 87.94,20.77 EPD_C10.1 90.28,20.6 EPD_C9.2 92.11,20.7 EPD_C8.1 95.34,20.91 EPD_C7.1 96.04,20.83 v96.5,20.38 102.62,20.38 | EPD_C6.1 103,20 102.62,20.38
  Bottom 0.3: v96.5,20.38 96.5,18.88 v98.5,16.88
EPD_3V3_C  (via drill 0.3)
  Top 0.3: Q2.1 93.62,33.62 93.62,37.38 R_CL1.1 93.5,37.38 86.75,37.38 TP13.TP 86.62,37.62 v35.88,37.62 | v21,52.5 20.5,52.5 20.5,53.88 U2.18
  Bottom 0.3: v35.88,37.62 v21,52.5
EPD_BUSY  (via drill 0.3)
  Top 0.15: v100.88,13.75 101.88,13.75 101.88,14.5 J1.9 | v16.12,47.5 10.38,53.25 10.38,53.88 U2.26 10.38,54 10.38,54.62 9.38,55.62 4.31,56.47 TP9.TP
  Bottom 0.15: v100.88,13.75 99.38,12.25 51.38,12.25 v16.12,47.5
EPD_CS  (via drill 0.3)
  Top 0.15: 22.38,28.38 22.38,30.09 R9.2 22.6,31.25 21.88,31.25 v21.62,31.5 | 22.38,28.38 21.33,28.38 D6.2 | v20.5,35.25 20.5,36.38 U2.11 | J1.12 100.38,14.5 100.38,12.79 100.85,12.31 | TP10.TP 103.24,13 102.55,12.31 100.85,12.31 | 100.85,12.31 99.33,12.31 98.39,13.25 93.75,13.25 92.67,14.34 87.67,14.34 86.67,15.34 86.61,15.34 85.34,16.6 31.51,16.6 23.13,24.99 23.13,27.62 22.38,28.38
  Bottom 0.15: v20.5,35.25 20.5,32.62 v21.62,31.5
EPD_DC  (via drill 0.3)
  Top 0.15: TP11.TP 114.7,16.38 100.88,16.38 v100.88,15.38 100.88,14.62 J1.11 | v25.38,34.12 17.5,34.12 17,33.62 15.12,33.62 14.25,34.5 12.88,34.5 12.88,36.38 U2.5
  Bottom 0.15: v25.38,34.12 29,34.12 51.15,11.97 100.24,11.97 101.38,13.11 101.38,14.88 v100.88,15.38
EPD_RST  (via drill 0.3)
  Top 0.15: J1.10 101.38,14.62 101.38,16 114,16 114.32,15.68 TP12.TP 114.32,12.8 113.8,12.8 111.5,10.5 60,10.5 v56.75,13.75 | U2.21 16.75,53.88 16.75,52.36 18.11,51 19.27,51 v19.39,50.88
  Bottom 0.15: v56.75,13.75 19.61,50.88 v19.39,50.88
FLASH_CS  (via drill 0.3)
  Top 0.15: v22,35.25 22,36.38 21.75,36.38 U2.12 21.75,36.5 21.75,37 v29.5,44.75 | R5.2 24.52,33.62 v23.62,33.62 | v50.88,68.88 50.88,69.38 U1.1 | v21.62,30.88 21.5,30.88 18,27.38 D9.2
  Bottom 0.15: v22,35.25 v23.62,33.62 23.62,32.88 v21.62,30.88 | v50.88,68.88 50.88,66.12 v29.5,44.75
GDR  (via drill 0.3)
  Top 0.15: v105.38,15.5 105.38,14.62 J1.2 | R4.2 81.62,29.38 82.5,28.5 90.38,28.5 Q3.1 90.5,28.38 91.16,27.71 93.83,27.71 95.45,29.34 95.98,29.34 96.34,28.97 96.34,27.91 v96.88,27.38
  Bottom 0.15: v96.88,27.38 99.88,27.38 105.32,21.93 105.32,20.3 104.32,19.3 104.32,16.91 103.09,15.68 103.09,15.32 103.34,15.07 104.55,15.07 104.98,15.5 v105.38,15.5
GND  (via drill 0.35)
  Top 0.3: U2.29_5 13.5,43.75 13.5,44.88 U2.29_6 | C1_BAT2.2 139,40.02 C3.- 132.54,41.75 132.54,42.15 132,42.68 IC4.2 | U4.6 142.85,30.75 U4.9 143.43,30.83 143.43,31 143.68,31.25 U4.4
  other vias: 102.79,13.54 105.58,12.38 106.34,32.45 98.05,36.45 140.89,31.31 161.46,16.96 3.09,91.38 13.38,89.85 81.05,14.45 80.05,19.45 8.04,38.45 11.04,40.45 49.05,107.45 99.05,13.45 150.04,54.45 127.84,42.26 105.94,24.09 135.04,52.17
  pour Top: 90.96,10.06 90.98,10.08 109.02,10.08 109.04,10.06 109.06,10.04 109.08,10.02 109.08,0.08 169.92,0.08 169.92,66.92 91.98,66.92 91.96,66.94 91.94,66.96 91.92,66.98 91.92,110.92 66.08,110.92 66.08,109.98 66.06,109.96 66.04,109.94 66.02,109.92 21.98,109.92 21.96,109.94 21.94,109.96 21.92,109.98 21.92,110.92 0.08,110.92 0.08,0.08 90.92,0.08 90.92,10.02 90.94,10.04
  pour Bottom: 90.96,10.06 90.98,10.08 109.02,10.08 109.04,10.06 109.06,10.04 109.08,10.02 109.08,0.08 169.92,0.08 169.92,66.92 91.98,66.92 91.96,66.94 91.94,66.96 91.92,66.98 91.92,110.92 66.08,110.92 66.08,109.98 66.06,109.96 66.04,109.94 66.02,109.92 21.98,109.92 21.96,109.94 21.94,109.96 21.92,109.98 21.92,110.92 0.08,110.92 0.08,54.41 0.08,54.42 0.11,54.43 6.37,54.43 6.39,54.42 6.41,54.4 6.43,54.37 6.43,36.05 6.41,36.02 6.33,35.94 6.3,35.92 0.08,35.92 0.08,0.08 90.92,0.08 90.92,10.02 90.94,10.04
GPIO8
  Top 0.15: R1.1 23.75,25.5 24.62,24.62 25.38,24.62 26.37,25.62 26.37,33.74 25.36,34.75 20.25,34.75 19.25,35.75 19.25,36.38 U2.10
I2C_PW  (via drill 0.3)
  Top 0.15: 158.62,16.12 157.38,16.12 SENSOR2.2 157.25,16.12 157.12,16.25 155.25,16.25 154.12,17.38 122.62,17.38 114.38,25.62 v103.12,25.62 | 158.62,16.12 159.5,15.25 160.12,15.25 SENSOR2.8 | 158.62,16.12 159.38,16.88 160.12,16.88 SENSOR2.6 | R1_PINH.1 87.93,44.63 89,44.88 90,45.88 90.5,45.88 R2_PINH.1 | v56.88,52.25 54.88,54.25 26.46,54.25 24.89,52.69 22.72,52.69 22.32,53.08 22.32,53.3 U2.17 | v64.38,44.75 84.88,44.75 R1_PINH.1 | v88.12,40.62 88.12,43.19 87.12,44.47 R1_PINH.1
  Bottom 0.15: v64.38,44.75 v56.88,52.25 | v88.12,40.62 v103.12,25.62
INT_RTC  (via drill 0.3)
  Top 0.15: v64,45.75 16.75,45.75 16.75,36.5 U2.8 | v70.25,52 70.62,52.38 82,52.38 87.88,58.25 87.88,58.75 U3.3 88,58.88 88,67.49 TP15.TP 87.5,67.5 90.25,67.5 v90.75,67 | v143.5,14.25 153.25,14.25 157,10.5 R1_PINH1.2
  Bottom 0.15: v70.25,52 v64,45.75 | v90.75,67 v143.5,14.25
IO/BOOT  (via drill 0.3)
  Top 0.15: C6.1 20.38,109 20.5,109.12 22.25,109.12 BOOT_BUTTON.4 22.38,109.25 25.75,109.25 BOOT_BUTTON.3 28.94,108.12 30.62,108.12 R_BOOT.2 30.88,107.75 30.25,107.75 v24.25,101.75 | v24.25,67.75 24.25,54 U2.15
  Bottom 0.15: v24.25,101.75 v24.25,67.75
IO/CHANGE  (via drill 0.3)
  Top 0.15: C10.1 67.5,109 67.38,109.12 65.88,109.12 CHANGE_BUTTON.3 65.75,109.25 62.38,109.25 CHANGE_BUTTON.4 61.52,108.43 61.51,108.43 61.25,108.16 58.16,108.16 57,107 57,106 58,105 59.41,105 R_CHANGE.2 60.25,104.12 v64.25,104.12 | v14.12,57 14.12,54 U2.23
  Bottom 0.15: v64.25,104.12 17.12,57 v14.12,57
MISO  (via drill 0.3)
  Top 0.15: TP6.TP 2,98.88 2.12,98.88 3.12,97.88 3.75,97.88 3.75,93.12 4.12,92.75 4.75,92.75 5,92.5 J4.P7 5.12,92.38 5.25,92.25 v6.25,92.25 | R8.2 6.38,29.5 6.38,27.38 9.75,27.38 D12.2 11.33,32.08 v12.25,33 | v22.38,68.25 50.88,68.25 U1.2 | v9.25,55.12 9.25,54 9.12,54 U2.27
  Bottom 0.15: v12.25,33 12.25,52.12 v9.25,55.12 v22.38,68.25 22.38,71.5 6.25,87.62 v6.25,92.25
MOSI  (via drill 0.3)
  Top 0.15: 4.62,88.38 4,88.38 0.62,91.75 0.62,99.32 1.5,100.19 3.06,100.19 3.56,99.69 TP7.TP | 4.62,88.38 4.75,88.38 5,88.12 J4.P3 | 17.88,32.25 14.12,28.5 14.12,27.38 13,27.38 D11.2 | 17.88,32.25 18.12,32.5 R7.2 17.88,32.25 | v15.38,34.88 15.38,36.38 U2.7 | 17.88,32.25 v17.38,32.75 | v59.75,64.5 58.62,65.62 U1.5 | J1.14 99.38,14.62 99.38,16.75 v99.48,16.85 | 4.62,88.38 4.62,87.48 4.12,86.98 4.12,85.41 5.12,84.41 5.12,71.02 13.03,63.12 13.03,62.35 v20.25,55.12
  Bottom 0.15: v17.38,32.75 17.38,32.88 v15.38,34.88 15.38,47.5 21.62,53.75 | 21.62,53.75 37.25,69.38 56.75,69.38 59.75,66.38 v59.75,64.5 59.75,63.88 99.48,24.15 v99.48,16.85 | 21.62,53.75 v20.25,55.12
N$1
  Top 0.15: R2-USB1.2 154.5,50.38 154.62,50.5 157.25,50.5 159.75,53 164.38,53 J2.A5
N$2  (via drill 0.3)
  Top 0.15: v153.75,52.25 153.25,52.25 153.25,51.5 R1-USB.1 | v157.5,56 164.38,56 J2.B5
  Bottom 0.15: v157.5,56 v153.75,52.25
N$3
  Top 0.15: R1_BAT.2 129.75,54.62 130.38,55.25 132.5,55.25 133.12,54.62 133.88,54.62 MCP73831.1
N$4  (via drill 0.3)
  Top 0.15: C1_BAT1.1 124.28,43.22 125.55,43.68 125.69,43.54 D2.1 126.38,43.56 127.28,43.56 127.35,43.49 | v132.38,46.38 137.62,46.38 137.75,46.5 Q1.2 | v129.88,43.88 129.75,43.75 129.13,43.75 IC4.1 129,43.63 127.83,43.63 127.77,43.56 127.49,43.56 127.42,43.49 127.35,43.49 | 127.35,43.49 127.35,42.1 127.7,41.76 128.94,41.76 IC4.3
  Bottom 0.15: v129.88,43.88 v132.38,46.38
N$5
  Top 0.15: R1_BAT.1 127,56 125.92,56 125.6,56.32 CHG_LED.C
N$6  (via drill 0.3)
  Top 0.15: v101.75,27.62 101.75,26.25 C4.1 | D3.2 103.92,36.3 v101.75,34.12 | v115.88,22.5 115.88,21.64 D4.1
  Bottom 0.15: v101.75,34.12 v101.75,27.62 110.75,27.62 v115.88,22.5
N$7
  Top 0.15: MCP73831.5 132.38,53.48 R2_BAT.2
N$8  (via drill 0.3)
  Top 0.15: J1.5 103.88,14.62 103.88,15.14 v103.52,15.5 | EPD_C2.2 109.05,19.12 v107.75,19.12
  Bottom 0.15: v107.75,19.12 107.14,19.12 v103.52,15.5
N$9  (via drill 0.3)
  Top 0.15: v96.38,17.12 96.38,14.62 J1.20 | EPD_C8.2 93.32,19.61 v94.22,18.71
  Bottom 0.15: v94.22,18.71 94.79,18.71 v96.38,17.12
N$10  (via drill 0.3)
  Top 0.15: v93.38,15.5 94.25,14.62 J1.24 | v87.38,16.75 87.05,16.75 EPD_C12.2
  Bottom 0.15: v93.38,15.5 89.66,19.22 88.98,19.22 88.73,18.97 88.73,18.1 v87.38,16.75
N$11  (via drill 0.3)
  Top 0.15: v104.38,15.5 104.38,14.62 J1.4 | v108.38,20.55 108.38,19.65 110.79,19.65 EPD_C1.2
  Bottom 0.15: v104.38,15.5 105.88,17 107,17 108.38,18.38 v108.38,20.55
N$12  (via drill 0.3)
  Top 0.15: v95.38,13.75 95.38,14.5 J1.22 | v89.15,18.79 88.62,18.79 EPD_C10.2
  Bottom 0.15: v95.38,13.75 94.19,13.75 v89.15,18.79
N$13
  Top 0.15: C_DELAY.1 48.54,98.66 IC1.5
N$14
  Top 0.15: R_CAPACITOR.1 93.82,59.18 93.25,59.75 93.25,61.38 93.12,61.38 D7.1
N$19  (via drill 0.3)
  Top 0.15: J1.19 96.88,14.62 96.88,15.86 98.32,17.3 99.85,17.3 v99.97,17.18 | v100.71,18.03 96.92,18.03 EPD_C7.2
  Bottom 0.15: v100.71,18.03 99.97,17.3 v99.97,17.18
N$20  (via drill 0.3)
  Top 0.15: v97.38,15.38 97.38,14.62 J1.18 | v101.47,17.95 103.13,17.95 EPD_C6.2
  Bottom 0.15: v97.38,15.38 100,15.38 101.47,16.84 v101.47,17.95
PREVGH  (via drill 0.3)
  Top 0.3: D5.1 80.41,20.09 83.55,16.95 85.49,16.95 86.75,15.69 91.81,15.69 93.31,17.19 | 93.31,17.19 93.62,16.88 95.88,16.88 95.88,14.62 J1.21 | v93.88,17.62 93.5,17.25 93.38,17.25 93.31,17.19 | v91.19,18.97 90.83,18.97 EPD_C9.1
  Bottom 0.3: v93.88,17.62 92.53,18.97 v91.19,18.97
PREVGL  (via drill 0.3)
  Top 0.3: v94.88,16.25 94.88,14.62 J1.23 | 95.25,18.25 v94.88,17.88 | D4.2 115.38,17.75 104.4,17.75 103.82,17.17 100.86,17.17 100.35,17.68 96.77,17.68 96.2,18.25 95.25,18.25 | EPD_C11.2 87.63,17.97 90.07,17.97 90.3,18.2 94.43,18.2 94.47,18.25 95.25,18.25
  Bottom 0.3: v94.88,16.25 v94.88,17.88
RESE  (via drill 0.3)
  Top 0.15: v104.88,13.75 104.88,14.5 J1.3 | v111.88,27.12 112.5,27.75 R3.2 | Q3.2 91.75,28.38 94.1,28.38 95.34,29.62 96.09,29.62 96.62,29.09 96.62,28.38 v97,28
  Bottom 0.15: v97,28 99.64,28 106.66,20.98 108.55,20.98 108.8,20.73 108.8,20.38 108.75,20.32 108.75,18.25 | 108.75,18.25 112.3,21.8 112.3,24.68 113.09,24.68 115.7,22.07 116.05,22.07 116.3,22.32 116.3,22.68 111.88,27.11 v111.88,27.12 | 108.75,18.25 108.65,18.15 108.65,16.58 108.49,16.42 107.55,16.42 v104.88,13.75
RESE'  (via drill 0.3)
  Top 0.15: R2.2 84.38,11.62 84.38,15.5 84.62,15.5 SJ1.2 85.21,15.06 86.55,15.06 89.05,12.56 89.57,12.56 91.07,14.06 92.55,14.06 94.67,11.94 103.69,11.94 v104.25,12.5 | v113.25,28.5 113.12,28.5 112.5,29.12 R3.1
  Bottom 0.15: v113.25,28.5 113.25,26.12 116.58,22.79 116.58,22.21 116.17,21.8 114.26,21.8 108.6,16.14 107.89,16.14 v104.25,12.5
RESET  (via drill 0.3)
  Top 0.15: C5.1 45.12,108.88 45.38,109.12 47.25,109.12 RESET_BUTTON.4 47.38,109.25 50.75,109.25 RESET_BUTTON.3 50.88,109.12 51.5,108.5 52.79,107.21 52.79,106.64 53.45,105.99 R_RESET.2 52.47,106.75 v51.88,106.75 | v44.88,102.75 44.88,101.73 IC1.1 45.35,100.63 46.75,99.23 47.1,99.23 47.22,99.11 47.22,98.35 46.75,97.87 v46.75,89 | v14.12,48.75 10.38,48.75 10.38,36.5 U2.3
  Bottom 0.15: v51.88,106.75 48.88,106.75 v44.88,102.75 | v46.75,89 15.18,57.43 13.95,57.43 13.7,57.18 13.7,56.82 14.12,56.39 v14.12,48.75
RTC_RST
  Top 0.15: U3.4 86.62,58.75 86.62,58.25 83.12,54.75 26.57,54.75 24.78,52.96 23.71,52.96 23.59,53.08 23.59,53.3 U2.16
RX
  Top 0.15: TP2.TP 2,63 9.64,63 12.2,60.44 12.2,54.53 U2.24
SCK  (via drill 0.3)
  Top 0.15: 6,90.5 5.38,90.5 5.12,90.25 J4.P5 | 6,90.5 6.75,91.25 8.67,92.6 TP8.TP | 15.25,34.38 15.88,34.38 16,34.25 R6.2 | 15.25,34.38 14,35.62 14,36.38 U2.6 | v15.88,29.12 15.88,27.38 D10.2 | 15.25,34.38 v15.12,34.25 | v99.88,15.88 99.88,14.62 J1.13 | v59.25,66.25 58.62,66.88 U1.6 | v36,38.38 v28,30.38 | 6,90.5 6.62,89.88 v6.75,89.88
  Bottom 0.15: 15.88,30.38 15.88,33.5 v15.12,34.25 13.42,35.95 13.42,57.29 22.88,66.75 22.88,71.5 6.75,87.62 v6.75,89.88 | 15.88,30.38 v15.88,29.12 | 60.38,62.75 59.25,63.88 v59.25,66.25 | v28,30.38 15.88,30.38 | 60.38,62.75 v36,38.38 | v99.88,15.88 99.32,16.43 99.3,16.43 99.05,16.68 99.05,24.07 60.38,62.75
SCL  (via drill 0.3)
  Top 0.15: 140.25,32.88 140.25,30.75 140.62,30.38 141.88,30.38 142,30.25 U4.7 | 157,20.88 157,17.75 157.25,17.75 SENSOR2.4 | 91.5,45.62 93.44,47.56 93.44,47.94 92,49.38 91,49.38 | 91.5,45.62 90.62,44.75 R2_PINH.2 | 91,49.38 90.62,49.38 U3.16 | 91,49.38 89.12,47.5 23.38,47.5 19.38,51.5 18,51.5 18,53.88 U2.20 | 140.25,32.88 139.75,33.38 v104.62,33.38 | 140.25,32.88 141.25,31.88 144.73,31.88 145.54,31.06 145.54,29.64 145.66,29.52 150.47,29.52 152.57,27.43 152.57,24.7 153.18,24.7 157,20.88 | v95.5,42.5 95.5,43.5 93.38,45.62 91.5,45.62 | 157,20.88 165.2,20.88 J3.4
  Bottom 0.15: v95.5,42.5 v104.62,33.38
SDA  (via drill 0.3)
  Top 0.15: v88,47 86,47 R1_PINH.2 | U3.15 89.38,49.38 89.38,48.38 v89,48 88.88,47.88 23.63,47.88 19.25,52.25 19.25,53.88 U2.19 | v106.12,30.38 112.62,30.38 113.25,29.75 U4.8 142.12,29.75 154.12,17.75 155.75,17.75 156.62,16.88 157.25,16.88 SENSOR2.3 157.38,16.88 157.88,16.88 160.62,19.62 164.95,19.62 J3.3
  Bottom 0.15: v89,48 v88,47 88,46.25 94.75,39.5 97,39.5 v106.12,30.38
SRC
  Top 0.15: 98.5,28.12 98.38,28.25 98.38,30.62 L1.1 98.25,30.62 91.12,30.62 Q3.3 | 98.5,28.12 100.38,26.25 C4.2 | 98.5,28.12 98.38,28.12 97.2,26.95 96.6,26.95 96.07,27.48 96.07,28.86 95.86,29.06 95.57,29.06 93.78,27.27 D5.2
SS_SD  (via drill 0.3)
  Top 0.15: v11.75,33.5 11.62,33.5 11.12,33 R10.2 | v11.75,35.25 11.75,36.38 11.62,36.38 U2.4 | D8.2 21.39,26.62 v20.75,26.62 | v6.62,86.12 6,86.75 5.62,86.75 5.5,86.88 J4.P2
  Bottom 0.15: v20.75,26.62 17.75,26.62 11.75,32.62 v11.75,33.5 v11.75,35.25 11.75,49.38 6.62,54.5 v6.62,86.12
TX
  Top 0.15: TP1.TP 2.28,60.75 6.93,60.75 11.55,56.13 U2.25
USB_D+
  Top 0.15: D1.1 151.88,55.75 147.38,55.75 137,66.12 119.75,66.12 105.81,52.19 107.81,52.19 111,49 111,45 108,42 96,42 93.25,39.25 27.25,39.25 24.5,36.5 24.25,36.5 U2.14
USB_D-  (via drill 0.3)
  Top 0.15: U2.13 23,36.38 23,35.88 23.62,35.25 24.75,35.25 28.38,38.88 93,38.88 93.1,38.97 93.36,38.97 95.39,41 108,41 112,45 112,49 107.88,53.12 v107.88,53.62 | v141.5,53.62 151.84,53.62 D1.3
  Bottom 0.15: v107.88,53.62 108.88,52.62 140.38,52.62 141.38,53.62 v141.5,53.62
VBAT  (via drill 0.3)
  Top 0.3: U4.2 144.12,30.25 144.12,30.75 U4.3 144.5,30.75 v144.88,31.12 | 137,56.5 134,56.5 MCP73831.3 | 137,56.5 137,56.62 133.62,60 C2_BAT.1 133.62,60.12 133.75,60.12 133.75,62 136.38,64.62 TP3.TP | v139,43.62 139,44.38 138.75,44.38 Q1.3 138.75,44.62 138.75,49.75 141,52 141,56 140,57 137.5,57 137,56.5
  Bottom 0.3: v144.88,31.12 144.88,37.75 v139,43.62
VBUS
  Top 0.3: MCP73831.4 131.25,56.5 125.92,56.5 CHG_LED.A 123.14,56.36 C1_BAT.1 | C1_BAT.1 120.1,57.64 TP14.TP | 153.38,54.62 153.38,53.62 152.75,53 146.12,53 139.75,46.62 Q1.1 139.62,46.5 139.62,43.5 139.12,43 138.75,43 137.38,44.38 130.88,44.38 130.88,44.5 127.62,44.5 127.62,45.5 124.62,45.5 | 153.38,54.62 154.38,54.62 D1.5 | 152.81,56.31 153.38,55.75 153.38,54.62 | 152.81,56.31 152.62,56.5 149,56.5 148.88,56.62 C4_USB.1 | C5_USB.1 156.62,58 155,56.38 152.88,56.38 152.81,56.31 | 124.62,45.5 124.62,55.33 C1_BAT.1 | 124.62,45.5 123.5,45.5 122.56,44.55 122.56,42.76 122.76,42.55 123.85,42.55 125.02,41.38 126.38,41.38 D2.2 124.53,39.63 R1_PWRUSB.2
VBUS1  (via drill 0.3)
  Top 0.3: v152.75,16.62 149.79,16.62 C1.1 | C2.1 151.09,30.08 152.93,28.24 152.93,25.2 v153,25.12
  Bottom 0.3: v153,25.12 152.75,24.87 v152.75,16.62
VRTC
  Top 0.3: 97.5,55.9 97.5,56.53 | 97.5,56.53 97.5,57.75 R_CAPACITOR.2 | 97.5,56.53 C8.2 97.5,55.9 | 97.5,55.9 97.5,55.64 97.5,54 96.75,54 C10_SUPERCAP.2 96.62,53.88 88,53.88 88,49.5 U3.14
VUSB
  Top 0.3: J2.A9 164.38,56.75 164.38,56.62 J2.B4 164.5,56.5 165.12,56.5 165.75,55.88 165.75,52.25 165.25,52.25 165,52 164.5,52 J2.B9 | J2.A4 164.38,51.75 164.38,52 J2.B9 | J2.B9 164.25,52 159.25,52 156.25,48.99 PFMF.050.1.2 154.53,46.47 154,47 151,47 150,46 150,44.37 PFMF.050.1.1